# EAGLE board atmegademo (EAGLE 6.4)
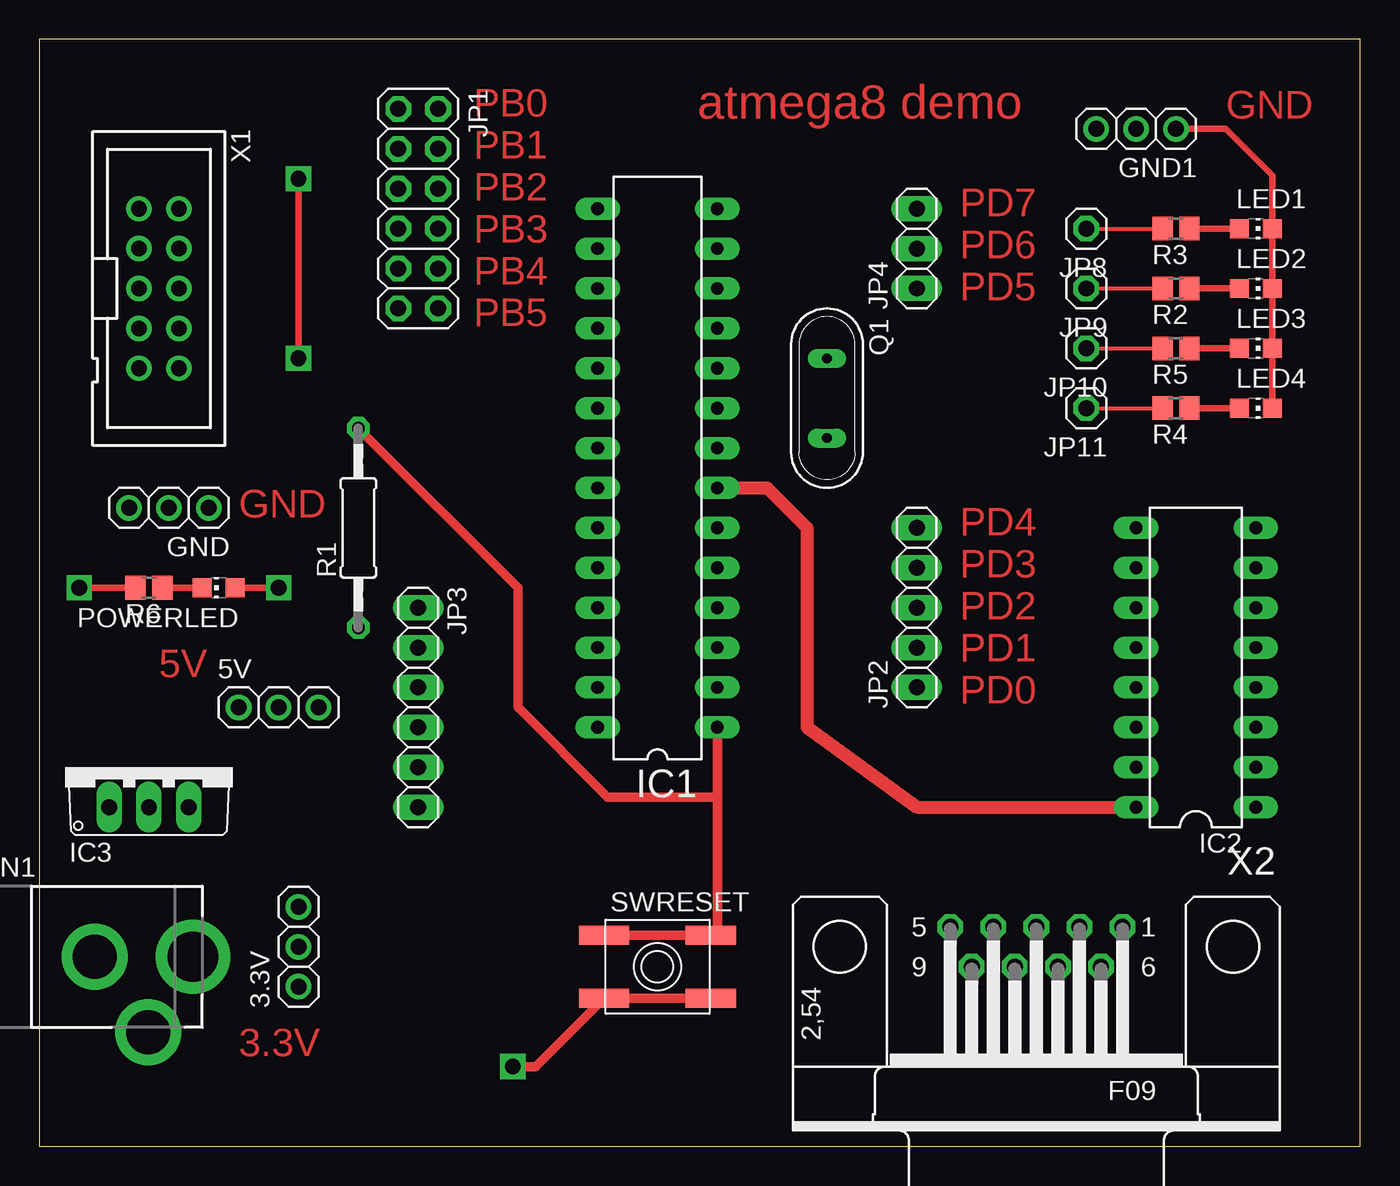
[diagram p0: board, top side]
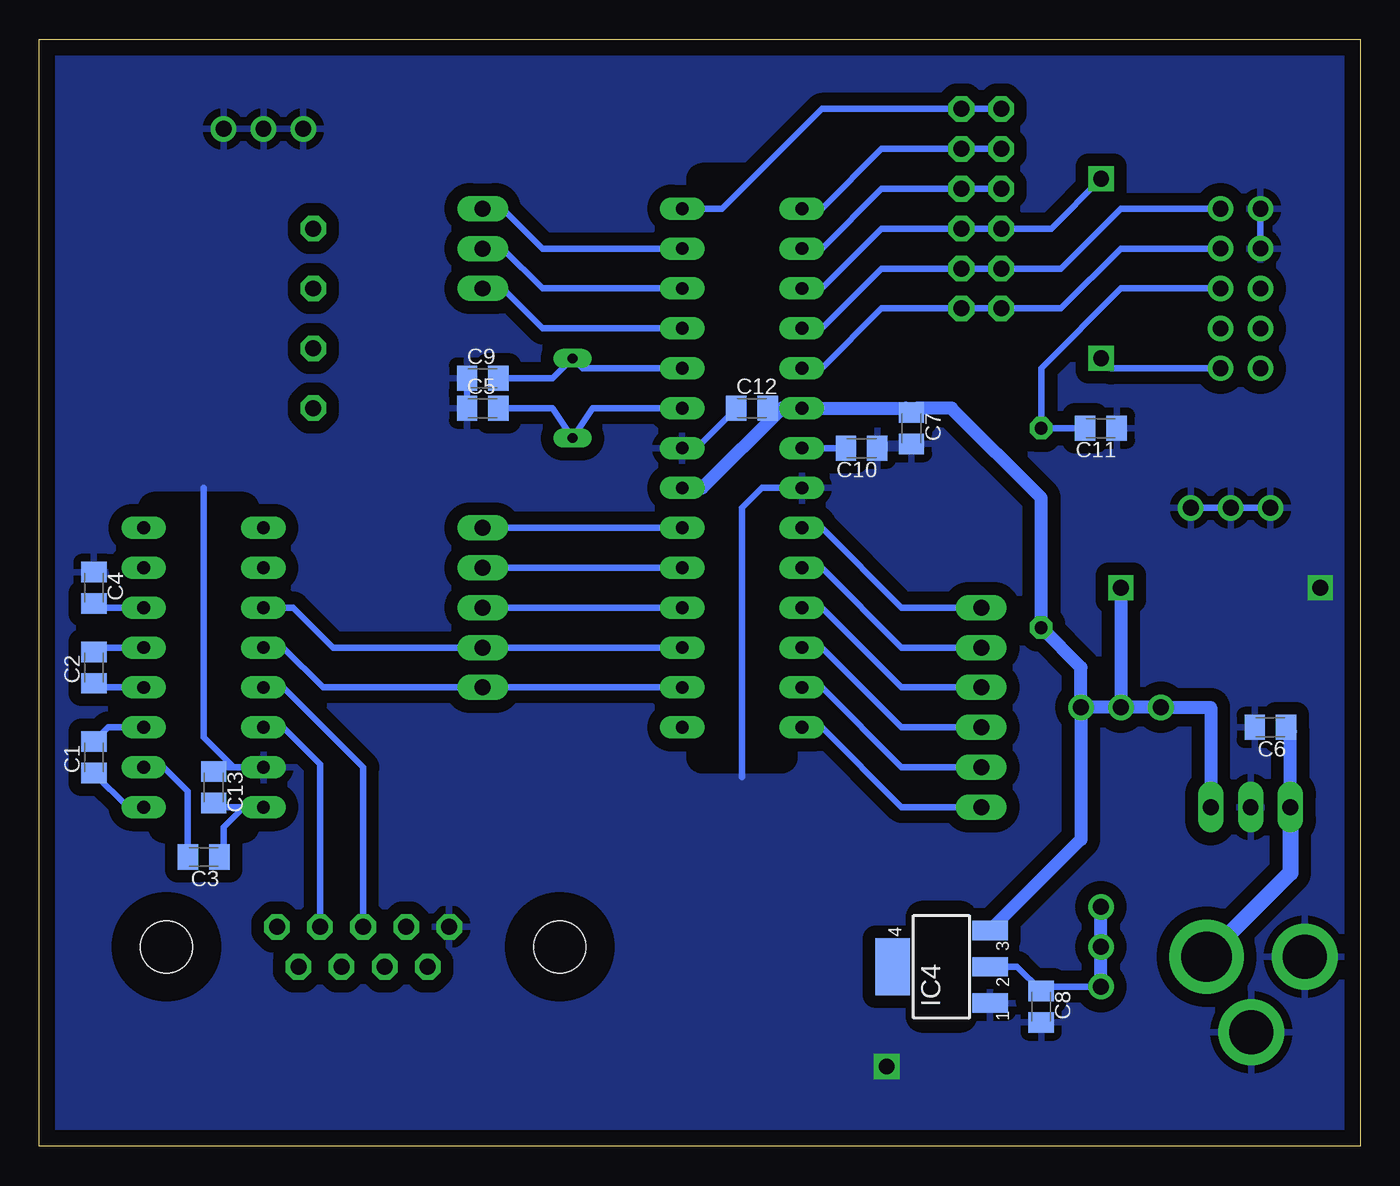
[diagram p1: board, bottom side, seen from below]

Size 84.12 x 70.47 mm. Coordinates in mm from the lower left corner, seen from the top.
Outline: 0,0 84.12,0 84.12,70.47 0,70.47 0,0
Copper layers (1*16): Top 0.035mm / dielectric 1.5mm / Bottom 0.035mm
Design rules "default *": minimum track width 10mil, minimum drill 39mil, track to track 12mil, track to pad 12mil, pad to pad 12mil, via to via 12mil, smd to smd 8mil, copper to edge 40mil, drill to drill 40mil, minimum pad ring 12mil, minimum via ring 12mil, stop-mask expansion 4mil, vias tented up to drill 0mil, thermal gap 20mil
Net classes: 0 default: clearance 0.355 mm
bRestrict: area 25.4,8.3 to 27.9,14.6; area 71.1,20.3 to 76.8,40.6; area 36.8,24.8 to 41.9,61.6

## Footprints (pad centres in the part's own frame; a part is rotated, then mirrored left to right if it is on the bottom)
1X03 = drill 1.016: 1 -2.54,0; 2 0,0; 3 2.54,0
C0805K = smd 1.3 x 1.6: 1 -1,0; 2 1,0
DCJACK_2MM_PTH = drill 2.8: GND 0,7.35; GNDBREAK 4.8,10.75 | drill 3.2: PWR 0,13.6
DIL28-3 = drill 0.813 long: 1 -16.51,-3.81; 2 -13.97,-3.81; 3 -11.43,-3.81; 4 -8.89,-3.81; 5 -6.35,-3.81; 6 -3.81,-3.81; 7 -1.27,-3.81; 8 1.27,-3.81; 9 3.81,-3.81; 10 6.35,-3.81; 11 8.89,-3.81; 12 11.43,-3.81; 13 13.97,-3.81; 14 16.51,-3.81; 15 16.51,3.81; 16 13.97,3.81; 17 11.43,3.81; 18 8.89,3.81; 19 6.35,3.81; 20 3.81,3.81; 21 1.27,3.81; 22 -1.27,3.81; 23 -3.81,3.81; 24 -6.35,3.81; 25 -8.89,3.81; 26 -11.43,3.81; 27 -13.97,3.81; 28 -16.51,3.81
DIL16 = drill 0.813 long: 1 -8.89,-3.81; 2 -6.35,-3.81; 3 -3.81,-3.81; 4 -1.27,-3.81; 5 1.27,-3.81; 6 3.81,-3.81; 7 6.35,-3.81; 8 8.89,-3.81; 9 8.89,3.81; 10 6.35,3.81; 11 3.81,3.81; 12 1.27,3.81; 13 -1.27,3.81; 14 -3.81,3.81; 15 -6.35,3.81; 16 -8.89,3.81
TO220V = drill 1.016 long: 1 -2.54,-2.54; 2 0,-2.54; 3 2.54,-2.54
SOT223 = smd 1.219 x 2.235: 1 -2.311,-3.099; 2 0,-3.099; 3 2.311,-3.099 | smd 3.6 x 2.2: 4 0,3.099
2X06 = drill 1.016 octagon: 1 -6.35,-1.27; 2 -6.35,1.27; 3 -3.81,-1.27; 4 -3.81,1.27; 5 -1.27,-1.27; 6 -1.27,1.27; 7 1.27,-1.27; 8 1.27,1.27; 9 3.81,-1.27; 10 3.81,1.27; 11 6.35,-1.27; 12 6.35,1.27
1X05 = drill 1.016 long: 1 -5.08,0; 2 -2.54,0; 3 0,0; 4 2.54,0; 5 5.08,0
1X06 = drill 1.016 long: 1 -6.35,0; 2 -3.81,0; 3 -1.27,0; 4 1.27,0; 5 3.81,0; 6 6.35,0
1X03' = drill 1.016 long: 1 -2.54,0; 2 0,0; 3 2.54,0
1X01 = drill 1.016 octagon: 1 0,0
CHIP-LED0805 = smd 1.2 x 1.2: A 0,-1.05; C 0,1.05
QS = drill 0.61 long: 1 -2.54,0; 2 2.54,0
0207/12 = drill 0.813 octagon: 1 -6.35,0; 2 6.35,0
R0805 = smd 1.3 x 1.5: 1 -0.85,0; 2 0.85,0
EVQ-Q2 = smd 3.2 x 1.2: A -3.4,-2; A' 3.4,-2; B -3.4,2; B' 3.4,2
PAK100/2500-10 = drill 1 pad 1.422: 1 -5.08,-1.27; 2 -5.08,1.27; 3 -2.54,-1.27; 4 -2.54,1.27; 5 0,-1.27; 6 0,1.27; 7 2.54,-1.27; 8 2.54,1.27; 9 5.08,-1.27; 10 5.08,1.27
F09H = drill 1.016 octagon: 1 -5.486,-1.27; 2 -2.743,-1.27; 3 0,-1.27; 4 2.743,-1.27; 5 5.486,-1.27; 6 -4.115,1.27; 7 -1.372,1.27; 8 1.372,1.27; 9 4.115,1.27 | hole 3.302: -12.522,0; 12.522,0

## Placement (x,y rotation side)
3.3V  [1X03]  16.51,12.7 90 top
5V  [1X03]  15.24,27.94 0 top
C1  [C0805K]  80.64,24.77 90 bottom
C2  [C0805K]  80.64,30.48 90 bottom
C3  [C0805K]  73.66,18.41 180 bottom
C4  [C0805K]  80.64,35.56 270 bottom
C5  [C0805K]  55.88,46.99 0 bottom
C6  [C0805K]  5.71,26.67 180 bottom
C7  [C0805K]  28.57,45.72 270 bottom
C8  [C0805K]  20.32,8.89 270 bottom
C9  [C0805K]  55.88,48.9 0 bottom
C10  [C0805K]  31.75,44.45 180 bottom
C11  [C0805K]  16.51,45.72 180 bottom
C12  [C0805K]  38.73,46.99 0 bottom
C13  [C0805K]  73.03,22.86 270 bottom
CN1  [DCJACK_2MM_PTH]  -3.81,12.06 270 top
GND  [1X03]  8.26,40.64 180 top
GND1  [1X03]  69.85,64.77 180 top
IC1  MEGA8-P  [DIL28-3]  39.37,43.18 90 top
IC2  MAX232  [DIL16]  73.66,30.48 90 top
IC3  7805TV  [TO220V]  6.99,24.13 0 top
IC4  317EMP  [SOT223]  26.67,11.43 90 bottom
JP1  [2X06]  24.13,59.69 270 top
JP2  [1X05]  55.88,34.29 90 top
JP3  [1X06]  24.13,27.94 270 top
JP4  [1X03']  55.88,57.15 90 top
JP8  [1X01]  66.67,58.42 180 top
JP9  [1X01]  66.67,54.61 180 top
JP10  [1X01]  66.67,50.8 180 top
JP11  [1X01]  66.67,46.99 180 top
LED1  [CHIP-LED0805]  77.47,58.42 270 top
LED2  [CHIP-LED0805]  77.47,54.61 270 top
LED3  [CHIP-LED0805]  77.47,50.8 270 top
LED4  [CHIP-LED0805]  77.47,46.99 270 top
POWERLED  [CHIP-LED0805]  11.43,35.56 90 top
Q1  [QS]  50.16,47.62 270 top
R1  [0207/12]  20.32,39.37 90 top
R2  [R0805]  72.39,54.61 180 top
R3  [R0805]  72.39,58.42 180 top
R4  [R0805]  72.39,46.99 180 top
R5  [R0805]  72.39,50.8 180 top
R6  [R0805]  6.99,35.56 180 top
SWRESET  SPST_TACT-EVQQ2  [EVQ-Q2]  39.37,11.43 0 top
X1  2510-  [PAK100/2500-10]  7.62,54.61 270 top
X2  [F09H]  63.5,12.7 180 top

## Library data of the parts
3.3V 5V CN1 GND GND1 SWRESET = adafruit
C1-C13 R1-R6 = resistor
IC1 = atmel; OC_FARNELL: unknown; OC_NEWARK: unknown
IC2 = maxim; MF: MAXIM; MPN: MAX232ACPE+; OC_FARNELL: 9723773; OC_NEWARK: 68K4544
IC3 IC4 = linear
JP1-JP4 JP8-JP11 = pinhead
LED1-LED4 POWERLED = led
Q1 = special
X1 = con-3m; MF: 3M; MPN: 2510-6002UB; OC_FARNELL: 9838244; OC_NEWARK: 46F4725
X2 = con-subd; OC_FARNELL: unknown; OC_NEWARK: unknown

## Nets
+3V3: 3.3V.1 3.3V.2 3.3V.3 C8.1 IC4.2
+5V: 5V.1 5V.2 5V.3 C3.1 C7.1 C12.2 C13.2 IC1.7 IC1.20 IC2.16 IC3.3 IC4.3 POWERLED.A R1.1
GND: C4.1 C5.1 C6.2 C7.2 C8.2 C9.1 C10.1 C11.1 C12.1 C13.1 CN1.GND CN1.GNDBREAK GND1.1 GND1.2 GND1.3 GND.1 GND.2 GND.3 IC1.8 IC1.22 IC2.15 IC3.2 IC4.1 LED1.C LED2.C LED3.C LED4.C R6.2 SWRESET.A SWRESET.A' X1.1 X1.3 X2.5
MISO: IC1.18 JP1.9 JP1.10 X1.2
MOSI: IC1.17 JP1.7 JP1.8 X1.10
N$1: C1.1 IC2.1
N$2: C1.2 IC2.3
N$3: C2.1 IC2.4
N$4: C2.2 IC2.5
N$5: C3.2 IC2.2
N$6: C4.2 IC2.6
N$7: JP8.1 R3.2
N$8: IC2.13 X2.3
N$9: IC2.14 X2.2
N$10: JP9.1 R2.2
N$11: IC1.4 JP2.3
N$12: IC1.5 JP2.4
N$13: IC1.6 JP2.5
N$14: C6.1 CN1.PWR IC3.1
N$15: IC1.11 JP4.1
N$16: IC1.23 JP3.1
N$17: IC1.12 JP4.2
N$18: IC1.13 JP4.3
N$19: IC1.24 JP3.2
N$20: IC1.25 JP3.3
N$21: IC1.26 JP3.4
N$22: JP10.1 R5.2
N$23: LED1.A R3.1
N$24: LED2.A R2.1
N$25: JP11.1 R4.2
N$26: C10.2 IC1.21
N$27: C5.2 IC1.9 Q1.2
N$28: LED4.A R4.1
N$29: LED3.A R5.1
N$30: C9.2 IC1.10 Q1.1
N$31: IC1.15 JP1.3 JP1.4
N$32: IC1.16 JP1.5 JP1.6
N$33: IC1.14 JP1.1 JP1.2
N$35: POWERLED.C R6.1
RESET: C11.2 IC1.1 R1.2 SWRESET.B SWRESET.B' X1.6
RX: IC1.2 IC2.12 JP2.1
RX_UNCON: X1.7
SCK: IC1.19 JP1.11 JP1.12 X1.4
SCL: IC1.28 JP3.6
SDA: IC1.27 JP3.5
TX: IC1.3 IC2.11 JP2.2
TX_UNCON: X1.5

## Tracks (layer width: path | path; a pad name or v marks a point on that pad's centre or on a via)
+3V3
  Bottom 0.406: IC4.2 21.86,11.43 C8.1 20.05,10.16 3.3V.1
  Bottom 0.813: 3.3V.1 3.3V.2 3.3V.3
+5V  (via drill 1)
  Top 0.406: POWERLED.A v15.24,35.56
  Top 0.813: IC1.7 46.35,41.91 48.9,39.37 48.9,26.67 55.88,21.59 IC2.16
  Bottom 0.406: 28.94,46.99 C7.1 28.21,46.99 | IC2.16 71.12,21.59 | 71.12,21.59 72.39,20.32 72.39,18.68 C3.1 | C12.2 IC1.20 | C13.2 72.75,21.59 71.12,21.59
  Bottom 0.813: 28.94,46.99 IC1.20 36.83,46.99 41.91,41.91 IC1.7 | 5V.2 5V.1 9.53,27.94 IC3.3 | 5V.2 5V.3 | 5V.3 17.78,19.53 IC4.3 | 5V.3 17.78,30.48 R1.1 20.32,41.27 26.04,46.99 28.21,46.99 | v15.24,35.56 5V.2
GND  (via drill 1)
  Top 0.406: R6.2 v2.54,35.56 | LED4.C LED3.C LED2.C LED1.C 78.52,61.81 75.56,64.77 GND1.1
  Top 0.61: SWRESET.A' SWRESET.A | SWRESET.A 34.83,9.43 | v30.15,5.08 31.62,5.08 SWRESET.A
  Bottom 0.406: X1.1 X1.3 | C9.1 C5.1 | GND.3 GND.2 GND.1 | IC2.15 71.75,24.13 | 71.75,24.13 73.66,26.04 73.66,41.91 | IC1.22 38.1,41.91 39.37,40.64 39.37,23.5 | IC1.8 42.27,44.45 C12.1 | 71.75,24.13 72.75,24.13 C13.1
  pour Bottom (isolate 0.813): -1.91,72.39 85.72,71.75 85.72,-1.91 -1.91,-1.27
MISO
  Bottom 0.406: X1.2 15.24,59.69 19.05,55.88 JP1.9 JP1.10 30.48,55.88 34.29,52.07 IC1.18
MOSI  (via drill 1)
  Top 0.406: v16.51,50.16 v16.51,61.59
  Bottom 0.406: X1.10 15.88,49.53 v16.51,50.16 | v16.51,61.59 19.68,58.42 JP1.7 JP1.8 30.48,58.42 34.29,54.61 IC1.17
N$1
  Bottom 0.406: IC2.1 78.47,21.59 C1.1
N$2
  Bottom 0.406: IC2.3 79.74,26.67 C1.2
N$3
  Bottom 0.406: IC2.4 80.38,29.21 C2.1
N$4
  Bottom 0.406: IC2.5 80.38,31.75 C2.2
N$5
  Bottom 0.406: C3.2 74.66,22.59 76.2,24.13 IC2.2
N$6
  Bottom 0.406: IC2.6 81.01,34.29 C4.2
N$7
  Top 0.254: JP8.1 R3.2
N$8
  Bottom 0.406: X2.3 63.5,24.13 68.58,29.21 IC2.13
N$9
  Bottom 0.406: X2.2 66.24,24.33 68.58,26.67 IC2.14
N$10
  Top 0.254: JP9.1 R2.2
N$11
  Bottom 0.406: IC1.4 JP2.3
N$12
  Bottom 0.406: IC1.5 JP2.4
N$13
  Bottom 0.406: IC1.6 JP2.5
N$14
  Bottom 0.813: IC3.1 4.45,26.4 C6.1
  Bottom 1.016: IC3.1 4.45,17.41 CN1.PWR
N$15
  Bottom 0.406: IC1.11 52.07,52.07 54.61,54.61 JP4.1
N$16
  Bottom 0.406: JP3.1 29.21,34.29 34.29,39.37 IC1.23
N$17
  Bottom 0.406: IC1.12 52.07,54.61 54.61,57.15 JP4.2
N$18
  Bottom 0.406: IC1.13 52.07,57.15 54.61,59.69 JP4.3
N$19
  Bottom 0.406: JP3.2 29.21,31.75 34.29,36.83 IC1.24
N$20
  Bottom 0.406: JP3.3 29.21,29.21 34.29,34.29 IC1.25
N$21
  Bottom 0.406: JP3.4 29.21,26.67 34.29,31.75 IC1.26
N$22
  Top 0.254: JP10.1 R5.2
N$23
  Top 0.406: R3.1 LED1.A
N$24
  Top 0.406: R2.1 LED2.A
N$25
  Top 0.254: JP11.1 R4.2
N$26
  Bottom 0.406: IC1.21 C10.2
N$27
  Bottom 0.406: IC1.9 48.9,46.99 Q1.2 51.44,46.99 C5.2
N$28
  Top 0.406: R4.1 LED4.A
N$29
  Top 0.406: LED3.A R5.1
N$30
  Bottom 0.406: IC1.10 49.53,49.53 Q1.1 51.44,48.9 C9.2
N$31
  Bottom 0.406: JP1.3 JP1.4 30.48,63.5 34.29,59.69 IC1.15
N$32
  Bottom 0.406: JP1.5 JP1.6 30.48,60.96 34.29,57.15 IC1.16
N$33
  Bottom 0.406: IC1.14 40.64,59.69 34.29,66.04 JP1.2 JP1.1
N$35
  Top 0.406: R6.1 POWERLED.C
RESET
  Top 0.61: IC1.1 43.18,22.23 | 43.18,22.23 43.18,13.84 SWRESET.B' SWRESET.B | R1.2 30.48,35.56 30.48,27.94 36.2,22.23 43.18,22.23
  Bottom 0.406: X1.6 15.24,54.61 20.32,49.53 R1.2 C11.2
RX
  Bottom 0.406: IC1.2 JP2.1 66.04,29.21 68.58,31.75 IC2.12
SCK
  Bottom 0.406: X1.4 15.24,57.15 19.05,53.34 JP1.11 JP1.12 30.48,53.34 34.29,49.53 IC1.19
SCL
  Bottom 0.406: JP3.6 29.21,21.59 34.29,26.67 IC1.28
SDA
  Bottom 0.406: JP3.5 29.21,24.13 34.29,29.21 IC1.27
TX
  Bottom 0.406: IC1.3 JP2.2 65.41,31.75 67.94,34.29 IC2.11

## Text on the board
Top: PB0 / PB1 / PB2 / PB3 / PB4 / PB5 | atmega8 demo | GND | PD7 / PD6 / PD5 | PD4 / PD3 / PD2 / PD1 / PD0 | GND | 5V | 3.3V